# Allegro board VESC_POWER.brd
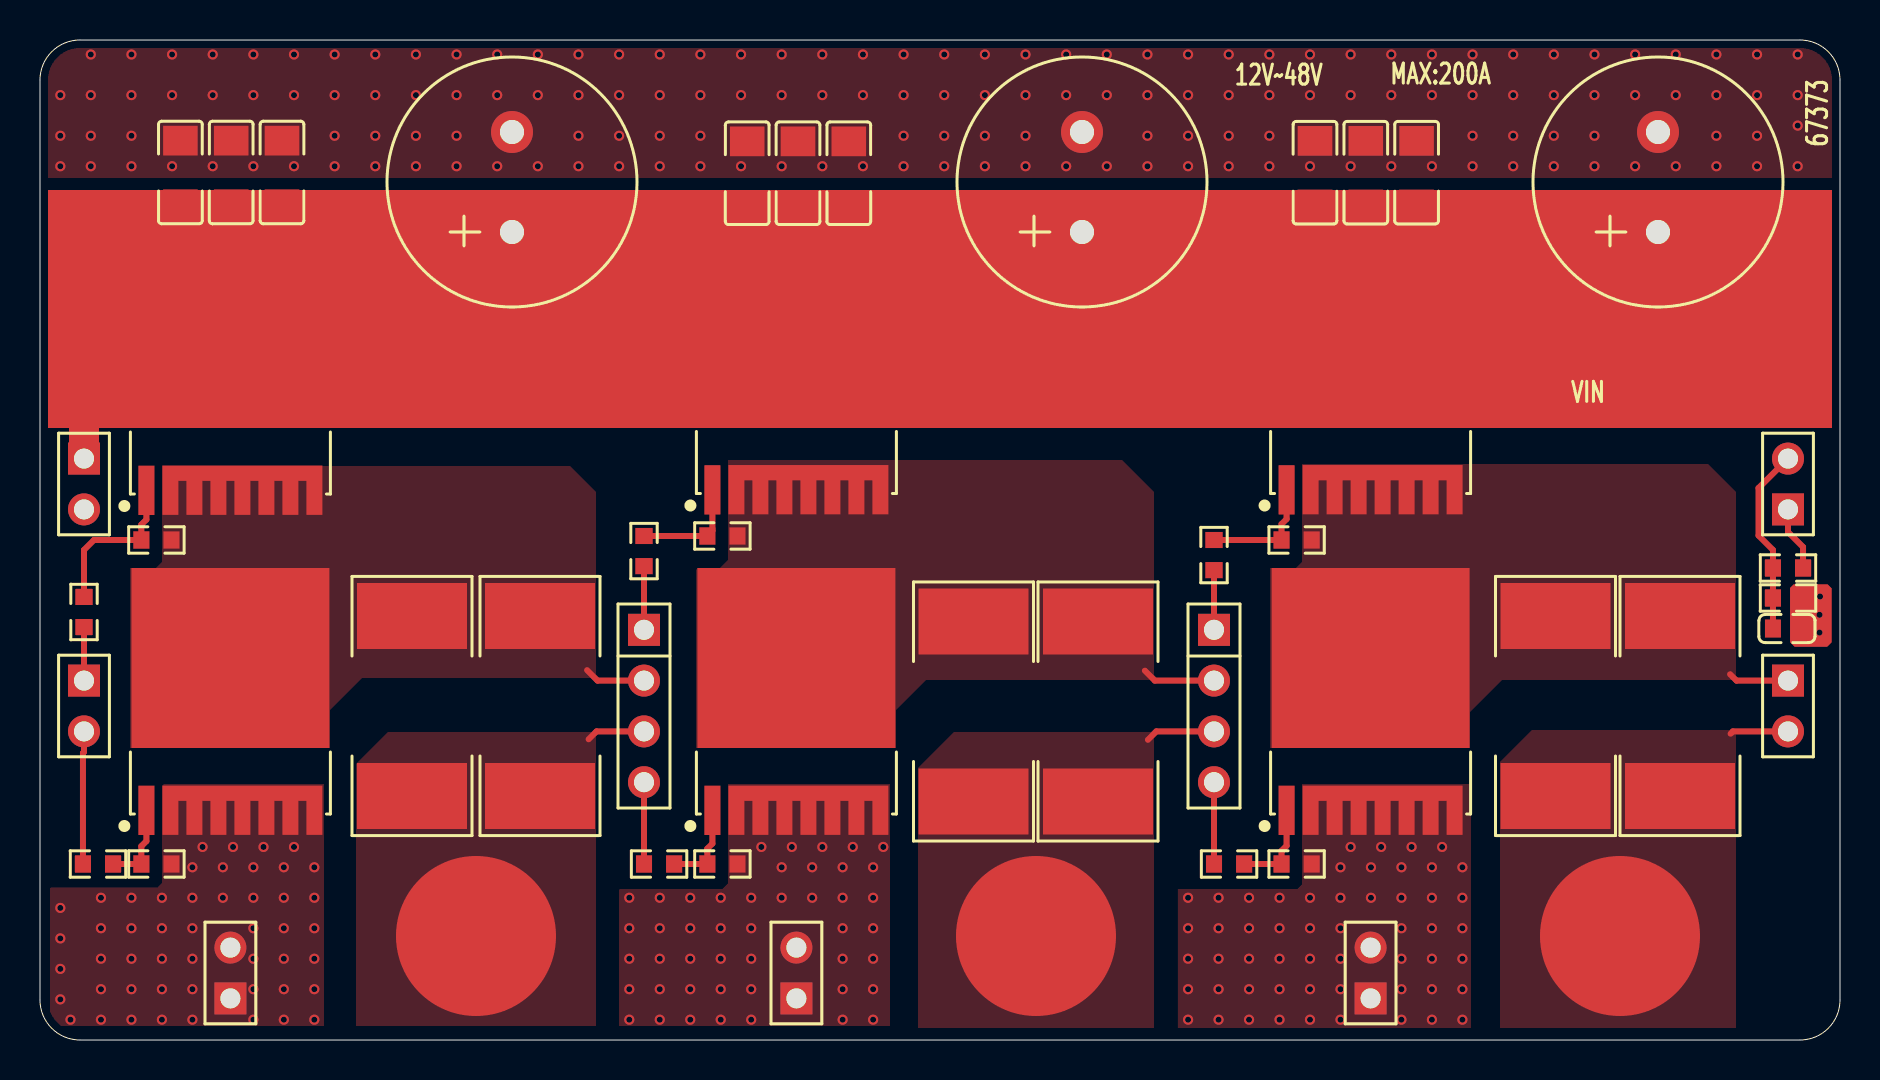
[diagram p0: board, top side]
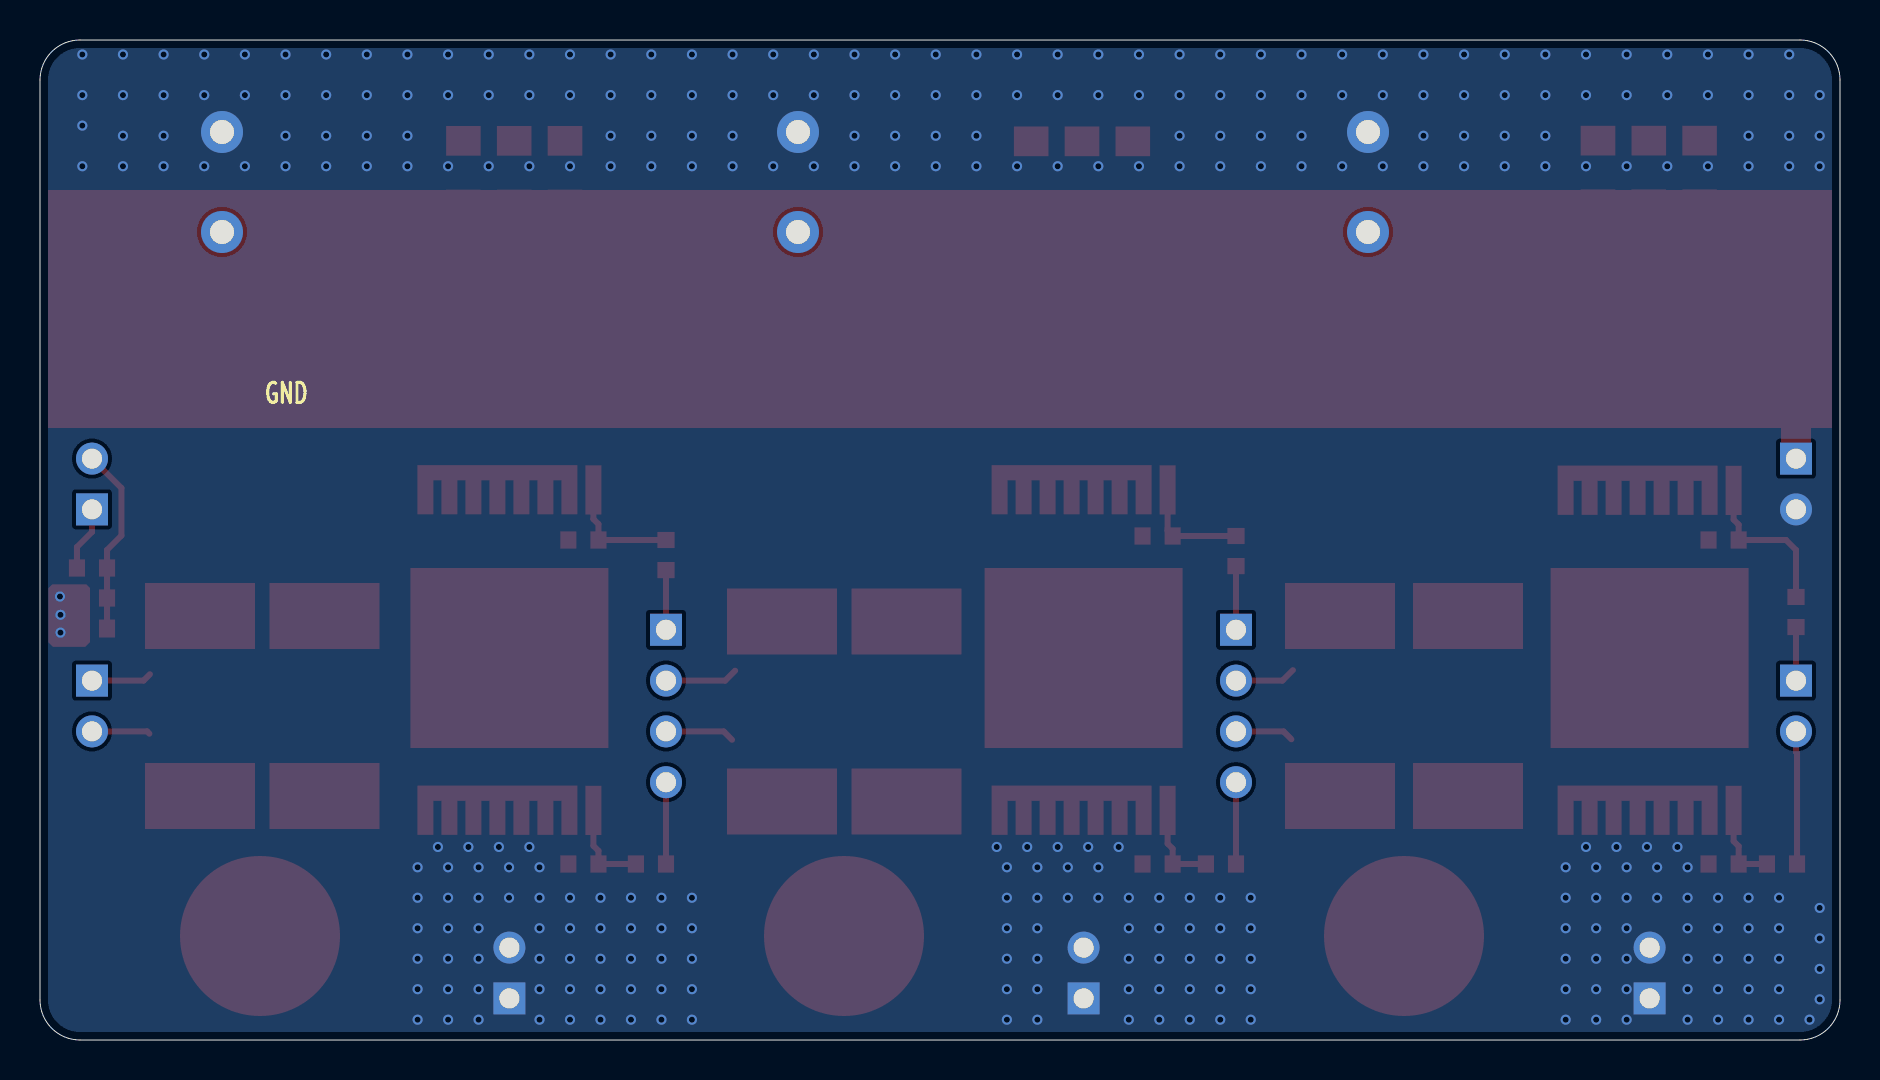
[diagram p1: board, bottom side, seen from below]

Outline 90 x 50 mm; copper layers: TOP, BOTTOM. Coordinates in mm from the lower left corner of the outline.
Outline path: 0,48 0,2 arc(0.59,0.59) 2,0 88,0 arc(89.41,0.59) 90,2 90,48 arc(89.41,49.41) 88,50 2,50 arc(0.59,49.41) 0,48

## Design rules (mm)
constraint set DEFAULT: 

## Placement (name value [footprint] x y rotation side)
C1  470uF/63V  [THR-12_5X30MM]  23.6 42.9 90 top
C2  470uF/63V  [THR-12_5X30MM]  80.9 42.9 90 top
C3  2.2uF/100V  [C1206]  68.83 43.37 270 top
C4  2.2uF/100V  [C1206]  63.75 43.37 270 top
C5  2.2uF/100V  [C1206]  40.44 43.34 270 top
C6  2.2uF/100V  [C1206]  37.9 43.34 270 top
C7  2.2uF/100V  [C1206]  35.36 43.34 270 top
C8  2.2uF/100V  [C1206]  12.1 43.38 270 top
C9  2.2uF/100V  [C1206]  66.29 43.37 270 top
C10  2.2uF/100V  [C1206]  9.56 43.38 270 top
C11  2.2uF/100V  [C1206]  7.02 43.38 270 top
C12  2.2uF/6.3V  [C0603]  87.35 20.57 0 top
C13  470uF/63V  [THR-12_5X30MM]  52.1 42.9 90 top
J12  CON2  [PZ-2P-2_54]  2.2 27.8 270 top
J13  CON4  [PZ-4P-2_54]  30.2 16.7 270 top
J14  CON2  [PZ-2P-2_54]  87.4 27.8 90 top
J15  CON4  [PZ-4P-2_54]  58.7 16.7 270 top
J16  CON2  [PZ-2P-2_54]  87.4 16.7 270 top
J17  CON2  [PZ-2P-2_54]  2.2 16.7 270 top
J18  CON2  [PZ-2P-2_54]  9.52 3.35 90 top
J19  CON2  [PZ-2P-2_54]  37.82 3.35 90 top
J20  CON2  [PZ-2P-2_54]  66.53 3.35 90 top
Q1  NCEP023N10LL  [TOLL]  9.52 31.1 90 top
Q2  NCEP023N10LL  [TOLL]  37.82 31.12 90 top
Q3  NCEP023N10LL  [TOLL]  66.53 31.12 90 top
Q4  NCEP023N10LL  [TOLL]  9.52 15.1 90 top
Q5  NCEP023N10LL  [TOLL]  37.82 15.1 90 top
Q6  NCEP023N10LL  [TOLL]  66.53 15.1 90 top
R1  5.1R/1%  [R0603]  2.2 21.4 90 top
R2  5.1R/1%  [R0603]  30.2 24.45 90 top
R3  5.1R/1%  [R0603]  58.7 24.25 90 top
R4  5.1K/1%  [R0603]  5.82 25 180 top
R5  5.1K/1%  [R0603]  34.12 25.2 180 top
R6  5.1K/1%  [R0603]  62.83 25 180 top
R7  1mR/1%  [R3920]  25 16.7 90 top
R8  1mR/1%  [R3920]  52.9 16.43 90 top
R9  1mR/1%  [R3920]  82 16.7 90 top
R10  1mR/1%  [R3920]  18.6 16.7 90 top
R11  1mR/1%  [R3920]  46.67 16.43 90 top
R12  1mR/1%  [R3920]  75.78 16.7 90 top
R13  5.1R/1%  [R0603]  2.9 8.8 0 top
R14  5.1R/1%  [R0603]  30.95 8.8 0 top
R15  5.1R/1%  [R0603]  59.45 8.8 0 top
R16  5.1K/1%  [R0603]  5.82 8.8 180 top
R17  5.1K/1%  [R0603]  34.12 8.8 180 top
R18  5.1K/1%  [R0603]  62.83 8.8 180 top
R19  10K/1%  [R0603]  87.4 22.1 180 top
RT1  NTC  [R0603]  87.4 23.6 180 top
TP1  PHA  [TP_8X8]  21.8 5.2 0 top
TP2  PHB  [TP_8X8]  49.8 5.2 0 top
TP3  PHC  [TP_8X8]  79 5.2 0 top

## Library data of the parts
C1 C2 C13 = CAP
C3-C12 = CAP NP
J12 J14 J16-J20 = CON2
J13 J15 = CON4
Q1-Q6 = MOSFET N
R1-R19 = RESISTOR
RT1 = NTC
TP1-TP3 = TEST POINT

## Footprints (pads in the part's own frame, mm; a bottom-side part is the same pattern mirrored in y, then rotated)
C0603
  rect 0.8x0.9 smd: 1(-0.7,0) 2(0.7,0)
C1206
  rect 1.485x1.728 smd: 1(-1.593,0) 2(1.59,0)
PZ-2P-2_54
  rect 1.6x1.6 hole 1: 1(-1.27,0)
  round 1.6 hole 1: 2(1.27,0)
PZ-4P-2_54
  rect 1.6x1.6 hole 1: 1(-3.81,0)
  round 1.6 hole 1: 2(-1.27,0) 3(1.27,0) 4(3.81,0)
R0603
  rect 0.806x0.864 smd: 1(-0.753,0) 2(0.753,0)
R3920
  rect 3.3x5.5 smd: 1(-4.5,0) 2(4.5,0)
THR-12_5X30MM
  round 2.1 hole 1.2: 1(-2.5,0) 2(2.5,0)
TOLL
  rect 2.463x0.8 smd: 1(-3.619,4.2)
  rect 9x9.9 smd: 2(4,0)
  custom 2.463x8 smd: 3(-3.61,-0.6)
TP_8X8
  round 8 smd: 1(0,0)

## Nets
3V3: J14.1 RT1.1
GND: C1.2 C2.2 C3.1 C4.1 C5.1 C6.1 C7.1 C8.1 C9.1 C10.1 C11.1 C12.2 C13.2 J12.2 J18.1 J18.2 J19.1 J19.2 J20.1 J20.2 Q4.3(SOURCE) Q5.3(SOURCE) Q6.3(SOURCE) R16.1 R17.1 R18.1 R19.1
VIN: C1.1 C2.1 C3.2 C4.2 C5.2 C6.2 C7.2 C8.2 C9.2 C10.2 C11.2 C13.1 J12.1 Q1.2 Q2.2 Q3.2
ADC_TEMP: C12.1 J14.2 R19.2 RT1.2
GHA: J17.1 R1.1
GHB: J13.1 R2.1
GHC: J15.1 R3.1
GLA: J17.2 R13.1
GLB: J13.4 R14.1
GLC: J15.4 R15.1
PHA: J13.3 R7.1 R10.1 TP1.1
PHB: J15.3 R8.1 R11.1 TP2.1
PHC: J16.2 R9.1 R12.1 TP3.1
SHA: J13.2 Q1.3(SOURCE) Q4.2 R4.1 R7.2 R10.2
SHB: J15.2 Q2.3(SOURCE) Q5.2 R5.1 R8.2 R11.2
SHC: J16.1 Q3.3(SOURCE) Q6.2 R6.1 R9.2 R12.2
N230732: Q1.1 R1.2 R4.2
N230750: Q2.1 R2.2 R5.2
N230768: Q3.1 R3.2 R6.2
N231314: Q4.1 R13.2 R16.2
N231332: Q5.1 R14.2 R17.2
N231350: Q6.1 R15.2 R18.2

## Via types
v1: diameter 0.508, hole 0.305, TOP to BOTTOM, 311 vias

## Routing (per net, layer and track width the routed paths; a pad name or vN(x,y) marks a point on that pad's centre or on a via; arc(x,y) is an arc through that point)
3V3: length 3.2
  TOP w0.3: RT1.1 88.15,24.65 87.4,25.4 J14.1
GND:
  vias: v1(1.02,47.24) v1(1.02,45.21) v1(1.02,43.69) v1(1.02,6.6) v1(1.02,5.08) v1(1.02,3.56) v1(1.02,2.03) v1(1.52,1.02) v1(2.54,49.28) v1(2.54,47.24) v1(2.54,45.21) v1(2.54,43.69) v1(3.05,7.11) v1(3.05,5.59) v1(3.05,4.06) v1(3.05,2.54) v1(3.05,1.02) v1(4.57,49.28) v1(4.57,47.24) v1(4.57,45.21) v1(4.57,43.69) v1(4.57,7.11) v1(4.57,5.59) v1(4.57,4.06) v1(4.57,2.54) v1(4.57,1.02) v1(6.1,7.11) v1(6.1,5.59) v1(6.1,4.06) v1(6.1,2.54) v1(6.1,1.02) v1(6.6,49.28) v1(6.6,47.24) v1(6.6,43.69) v1(7.62,8.64) v1(7.62,7.11) v1(7.62,5.59) v1(7.62,4.06) v1(7.62,2.54) v1(7.62,1.02) v1(8.13,9.65) v1(8.64,49.28) v1(8.64,47.24) v1(8.64,43.69) v1(9.14,8.64) v1(9.14,7.11) v1(9.65,9.65) v1(10.67,49.28) v1(10.67,47.24) v1(10.67,43.69) v1(10.67,8.64) v1(10.67,7.11) v1(10.67,5.59) v1(10.67,4.06) v1(10.67,2.54) v1(10.67,1.02) v1(11.18,9.65) v1(12.19,8.64) v1(12.19,7.11) v1(12.19,5.59) v1(12.19,4.06) v1(12.19,2.54) v1(12.19,1.02) v1(12.7,49.28) v1(12.7,47.24) v1(12.7,43.69) v1(12.7,9.65) v1(13.72,8.64) v1(13.72,7.11) v1(13.72,5.59) v1(13.72,4.06) v1(13.72,2.54) v1(13.72,1.02) v1(14.73,49.28) v1(14.73,47.24) v1(14.73,45.21) v1(14.73,43.69) v1(16.76,49.28) v1(16.76,47.24) v1(16.76,45.21) v1(16.76,43.69) v1(18.8,49.28) v1(18.8,47.24) v1(18.8,45.21) v1(18.8,43.69) v1(20.83,49.28) v1(20.83,47.24) v1(20.83,45.21) v1(20.83,43.69) v1(22.86,49.28) v1(22.86,47.24) v1(22.86,43.69) v1(24.89,49.28) v1(24.89,47.24) v1(24.89,43.69) v1(26.92,49.28) v1(26.92,47.24) v1(26.92,45.21) v1(26.92,43.69) v1(28.96,49.28) v1(28.96,47.24) v1(28.96,45.21) v1(28.96,43.69) v1(29.46,7.11) v1(29.46,5.59) v1(29.46,4.06) v1(29.46,2.54) v1(29.46,1.02) v1(30.99,49.28) v1(30.99,47.24) v1(30.99,45.21) v1(30.99,43.69) v1(30.99,7.11) v1(30.99,5.59) v1(30.99,4.06) v1(30.99,2.54) v1(30.99,1.02) v1(32.51,7.11) v1(32.51,5.59) v1(32.51,4.06) v1(32.51,2.54) v1(32.51,1.02) v1(33.02,49.28) v1(33.02,47.24) v1(33.02,45.21) v1(33.02,43.69) v1(34.04,7.11) v1(34.04,5.59) v1(34.04,4.06) v1(34.04,2.54) v1(34.04,1.02) v1(35.05,49.28) v1(35.05,47.24) v1(35.05,43.69) v1(35.56,7.11) v1(35.56,5.59) v1(35.56,4.06) v1(35.56,2.54) v1(35.56,1.02) v1(36.07,9.65) v1(37.08,49.28) v1(37.08,47.24) v1(37.08,43.69) v1(37.08,8.64) v1(37.08,7.11) v1(37.59,9.65) v1(38.61,8.64) v1(38.61,7.11) v1(39.12,49.28) v1(39.12,47.24) v1(39.12,43.69) v1(39.12,9.65) v1(40.13,8.64) v1(40.13,7.11) v1(40.13,5.59) v1(40.13,4.06) v1(40.13,2.54) v1(40.13,1.02) v1(40.64,9.65) v1(41.15,49.28) v1(41.15,47.24) v1(41.15,43.69) v1(41.66,8.64) v1(41.66,7.11) v1(41.66,5.59) v1(41.66,4.06) v1(41.66,2.54) v1(41.66,1.02) v1(42.16,9.65) v1(43.18,49.28) v1(43.18,47.24) v1(43.18,45.21) v1(43.18,43.69) v1(45.21,49.28) v1(45.21,47.24) v1(45.21,45.21) v1(45.21,43.69) v1(47.24,49.28) v1(47.24,47.24) v1(47.24,45.21) v1(47.24,43.69) v1(49.28,49.28) v1(49.28,47.24) v1(49.28,45.21) v1(49.28,43.69) v1(51.31,49.28) v1(51.31,47.24) v1(51.31,43.69) v1(53.34,49.28) v1(53.34,47.24) v1(53.34,43.69) v1(55.37,49.28) v1(55.37,47.24) v1(55.37,45.21) v1(55.37,43.69) v1(57.4,49.28) v1(57.4,47.24) v1(57.4,45.21) v1(57.4,43.69) v1(57.4,7.11) v1(57.4,5.59) v1(57.4,4.06) v1(57.4,2.54) v1(57.4,1.02) v1(58.93,7.11) v1(58.93,5.59) v1(58.93,4.06) v1(58.93,2.54) v1(58.93,1.02) v1(59.44,49.28) v1(59.44,47.24) v1(59.44,45.21) v1(59.44,43.69) v1(60.45,7.11) v1(60.45,5.59) v1(60.45,4.06) v1(60.45,2.54) v1(60.45,1.02) v1(61.47,49.28) v1(61.47,47.24) v1(61.47,45.21) v1(61.47,43.69) v1(61.98,7.11) v1(61.98,5.59) v1(61.98,4.06) v1(61.98,2.54) v1(61.98,1.02) v1(63.5,49.28) v1(63.5,47.24) v1(63.5,43.69) v1(63.5,7.11) v1(63.5,5.59) v1(63.5,4.06) v1(63.5,2.54) v1(63.5,1.02) v1(65.02,8.64) v1(65.02,7.11) v1(65.02,5.59) v1(65.02,4.06) v1(65.02,2.54) v1(65.02,1.02) v1(65.53,49.28) v1(65.53,47.24) v1(65.53,43.69) v1(65.53,9.65) v1(66.55,8.64) v1(66.55,7.11) v1(67.06,9.65) v1(67.56,49.28) v1(67.56,47.24) v1(67.56,43.69) v1(68.07,8.64) v1(68.07,7.11) v1(68.07,5.59) v1(68.07,4.06) v1(68.07,2.54) v1(68.07,1.02) v1(68.58,9.65) v1(69.6,49.28) v1(69.6,47.24) v1(69.6,43.69) v1(69.6,8.64) v1(69.6,7.11) v1(69.6,5.59) v1(69.6,4.06) v1(69.6,2.54) v1(69.6,1.02) v1(70.1,9.65) v1(71.12,8.64) v1(71.12,7.11) v1(71.12,5.59) v1(71.12,4.06) v1(71.12,2.54) v1(71.12,1.02) v1(71.63,49.28) v1(71.63,47.24) v1(71.63,45.21) v1(71.63,43.69) v1(73.66,49.28) v1(73.66,47.24) v1(73.66,45.21) v1(73.66,43.69) v1(75.69,49.28) v1(75.69,47.24) v1(75.69,45.21) v1(75.69,43.69) v1(77.72,49.28) v1(77.72,47.24) v1(77.72,45.21) v1(77.72,43.69) v1(79.76,49.28) v1(79.76,47.24) v1(79.76,43.69) v1(81.79,49.28) v1(81.79,47.24) v1(81.79,43.69) v1(83.82,49.28) v1(83.82,47.24) v1(83.82,45.21) v1(83.82,43.69) v1(85.85,49.28) v1(85.85,47.24) v1(85.85,45.21) v1(85.85,43.69) v1(87.88,49.28) v1(87.88,47.24) v1(87.88,45.72) v1(87.88,43.69) v1(89,22.17) v1(88.98,21.26) v1(88.98,20.37)
VIN: length 2.7
  TOP w0.2: 2.2,31.66 2.11,31.75
  TOP w1.5: J12.1 2.2,31.66
ADC_TEMP: length 9.4
  TOP w0.3: J14.2 85.93,27.6 85.93,25.22 86.65,24.5 RT1.2 R19.2 86.65,20.57
GHA: length 2.7
  TOP w0.3: R1.1 J17.1
GHB: length 3.2
  TOP w0.3: R2.1 J13.1
GHC: length 3
  TOP w0.3: J15.1 R3.1
GLA: length 6.7
  TOP w0.3: R13.1 2.15,14.35 2.2,14.4 J17.2
GLB: length 4.1
  TOP w0.3: R14.1 J13.4
GLC: length 4.1
  TOP w0.3: J15.4 R15.1
PHA: length 2.9
  TOP w0.3: 27.43,15.04 27.83,15.43 J13.3
PHB: length 3.5
  TOP w0.3: J15.3 55.82,15.43 55.4,15.01
PHC: length 2.9
  TOP w0.3: 84.53,15.32 84.64,15.43 J16.2
SHA: length 3.1
  TOP w0.3: J13.2 27.88,17.97 27.36,18.49
SHB: length 3.7
  TOP w0.3: J15.2 55.74,17.97 55.24,18.47
SHC: length 3
  TOP w0.3: J16.1 84.82,17.97 84.51,18.29
N230732: length 8
  TOP w0.3: Q1.1 5.32,26.02 5.07,25.77 R4.2 2.7,25 2.2,24.5 R1.2
N230750: length 5.6
  TOP w0.3: R2.2 R5.2 33.62,25.45 Q2.1
N230768: length 6
  TOP w0.3: R3.2 R6.2 62.08,25.79 62.33,26.05 Q3.1
N231314: length 4.2
  TOP w0.3: Q4.1 5.32,9.94 5.07,9.69 R16.2 R13.2
N231332: length 4.4
  TOP w0.3: R14.2 R17.2 33.37,9.57 33.62,9.82 Q5.1
N231350: length 4.7
  TOP w0.3: R15.2 R18.2 62.08,9.46 62.33,9.71 Q6.1

## Copper pours and planes (outline as drawn; the poured copper is in the pictures)
GND on TOP (solid shape): 89.59,22.58 89.59,19.89 89.36,19.66 87.73,19.66 87.5,19.89 87.5,22.61 87.68,22.78 89.38,22.78
GND on TOP: 1.3,49.6 88.7,49.6 89.6,48.7 89.6,43.1 0.4,43.1 0.4,48.7
GND on TOP: 63.1,12.8 63.1,7.78 62.87,7.54 56.9,7.54 56.9,0.6 71.55,0.6 71.55,12.8
GND on TOP: 6.2,12.8 14.2,12.8 14.2,0.7 0.51,0.7 0.51,7.62 5.87,7.62 6.1,7.85 6.1,12.7
GND on TOP: 34.4,12.8 34.4,7.83 34.11,7.54 28.96,7.54 28.96,0.7 42.5,0.7 42.5,12.8
GND on BOTTOM: -9.47,56.57 -9.47,-5.66 95.12,-5.66 95.12,56.57
VIN on TOP (solid shape): 89.6,30.6 0.4,30.6 0.4,42.5 89.6,42.5
PHA on TOP: 15.8,13.8 17.4,15.4 27.8,15.4 27.8,0.7 15.8,0.7
PHB on TOP: 43.9,13.6 45.7,15.4 55.7,15.4 55.7,0.6 43.9,0.6
PHC on TOP: 73,13.9 74.6,15.5 84.8,15.5 84.8,0.6 73,0.6
SHA on TOP: 6.1,28.7 26.5,28.7 27.8,27.4 27.8,18.1 16.1,18.1 14.5,16.5 14.5,14.6 4.5,14.6 4.5,23.6 5.8,23.6 6.1,23.9
SHB on TOP: 34.4,29 54.1,29 55.7,27.4 55.7,18 44.3,18 42.8,16.5 42.8,14.6 32.8,14.6 32.8,23.5 32.9,23.6 34,23.6 34.4,24
SHC on TOP: 63.1,28.8 83.4,28.8 84.8,27.4 84.8,18 73.1,18 71.5,16.4 71.5,14.6 61.5,14.6 61.5,23.6 62.8,23.6 63.1,23.9

## Text on the board
Ref Des/Silkscreen Bottom: GND
Ref Des/Silkscreen Top: 12V~48V | MAX:200A | VIN | 67373
